# EAGLE board untitled (EAGLE 7.2.0)
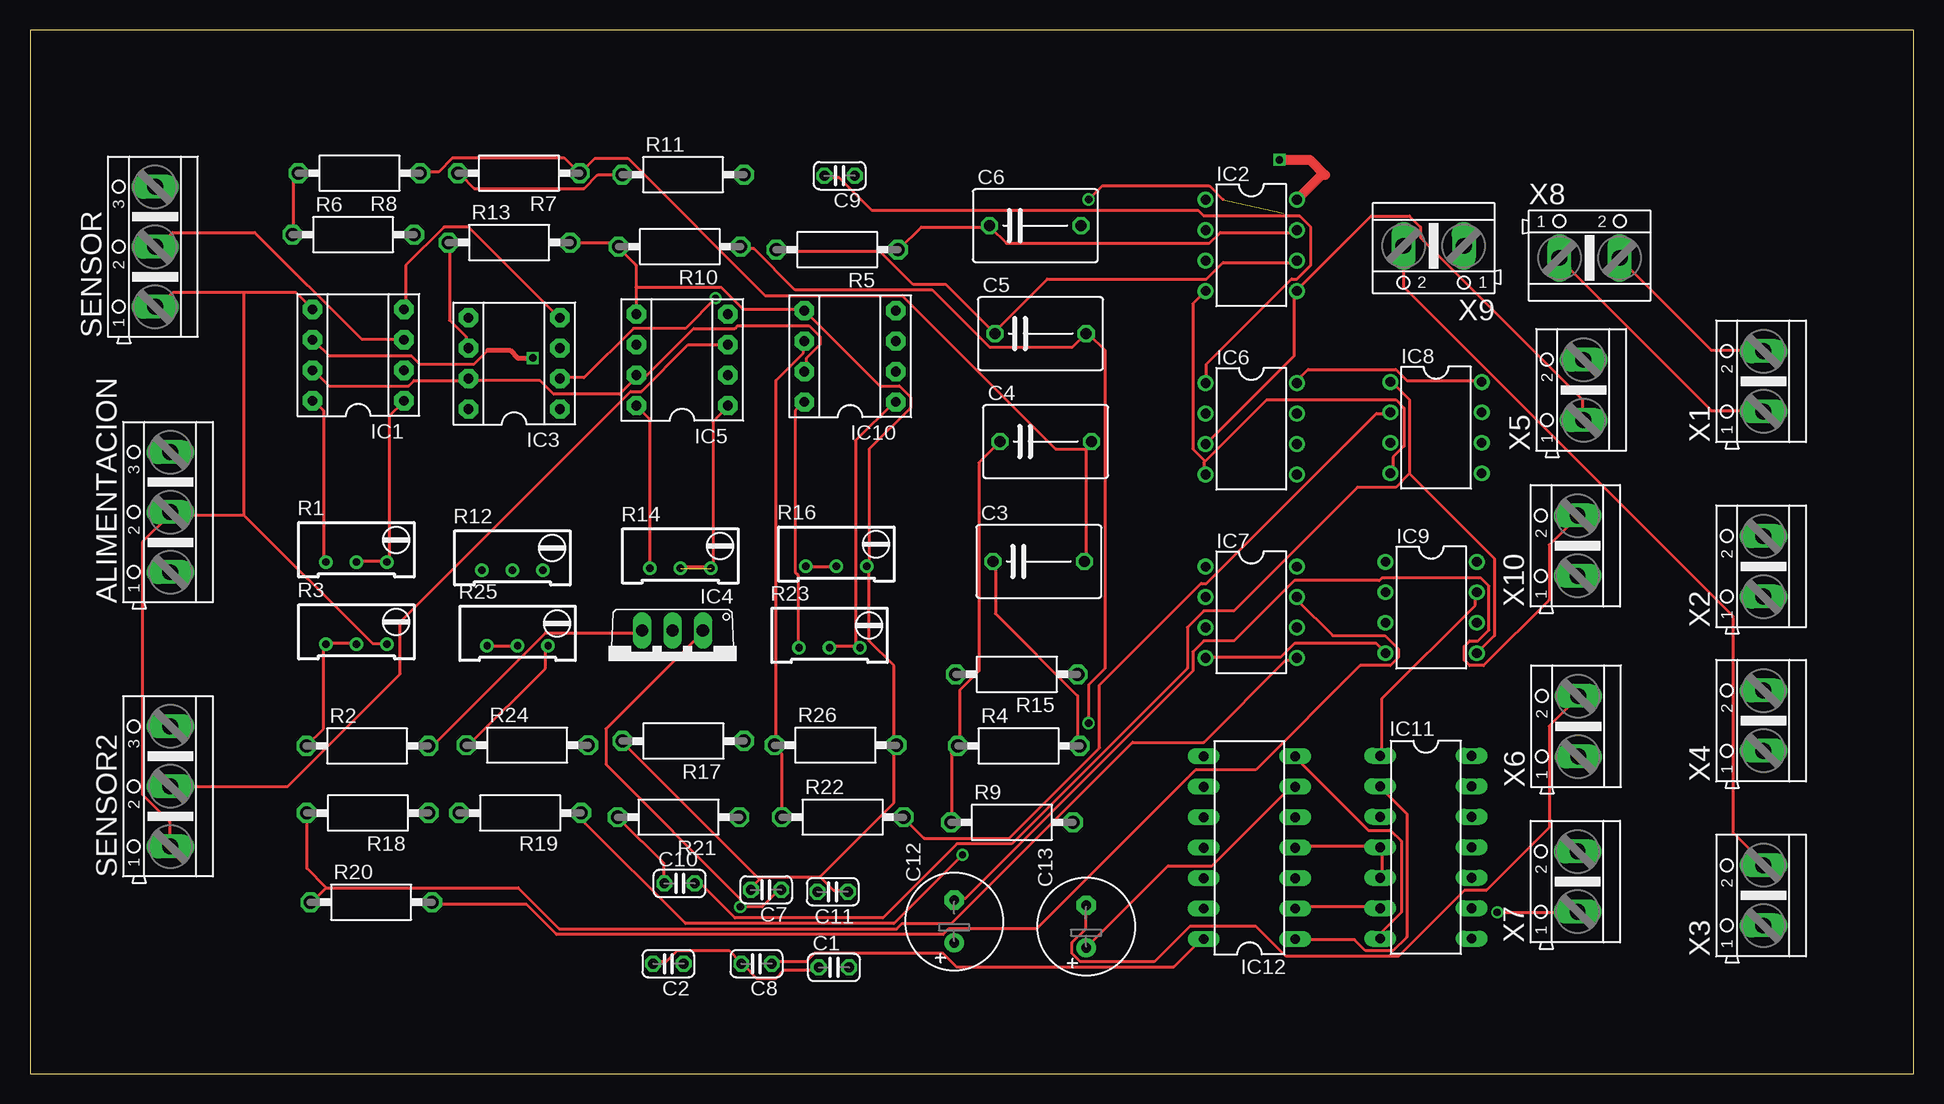
[diagram p0: board, top side]
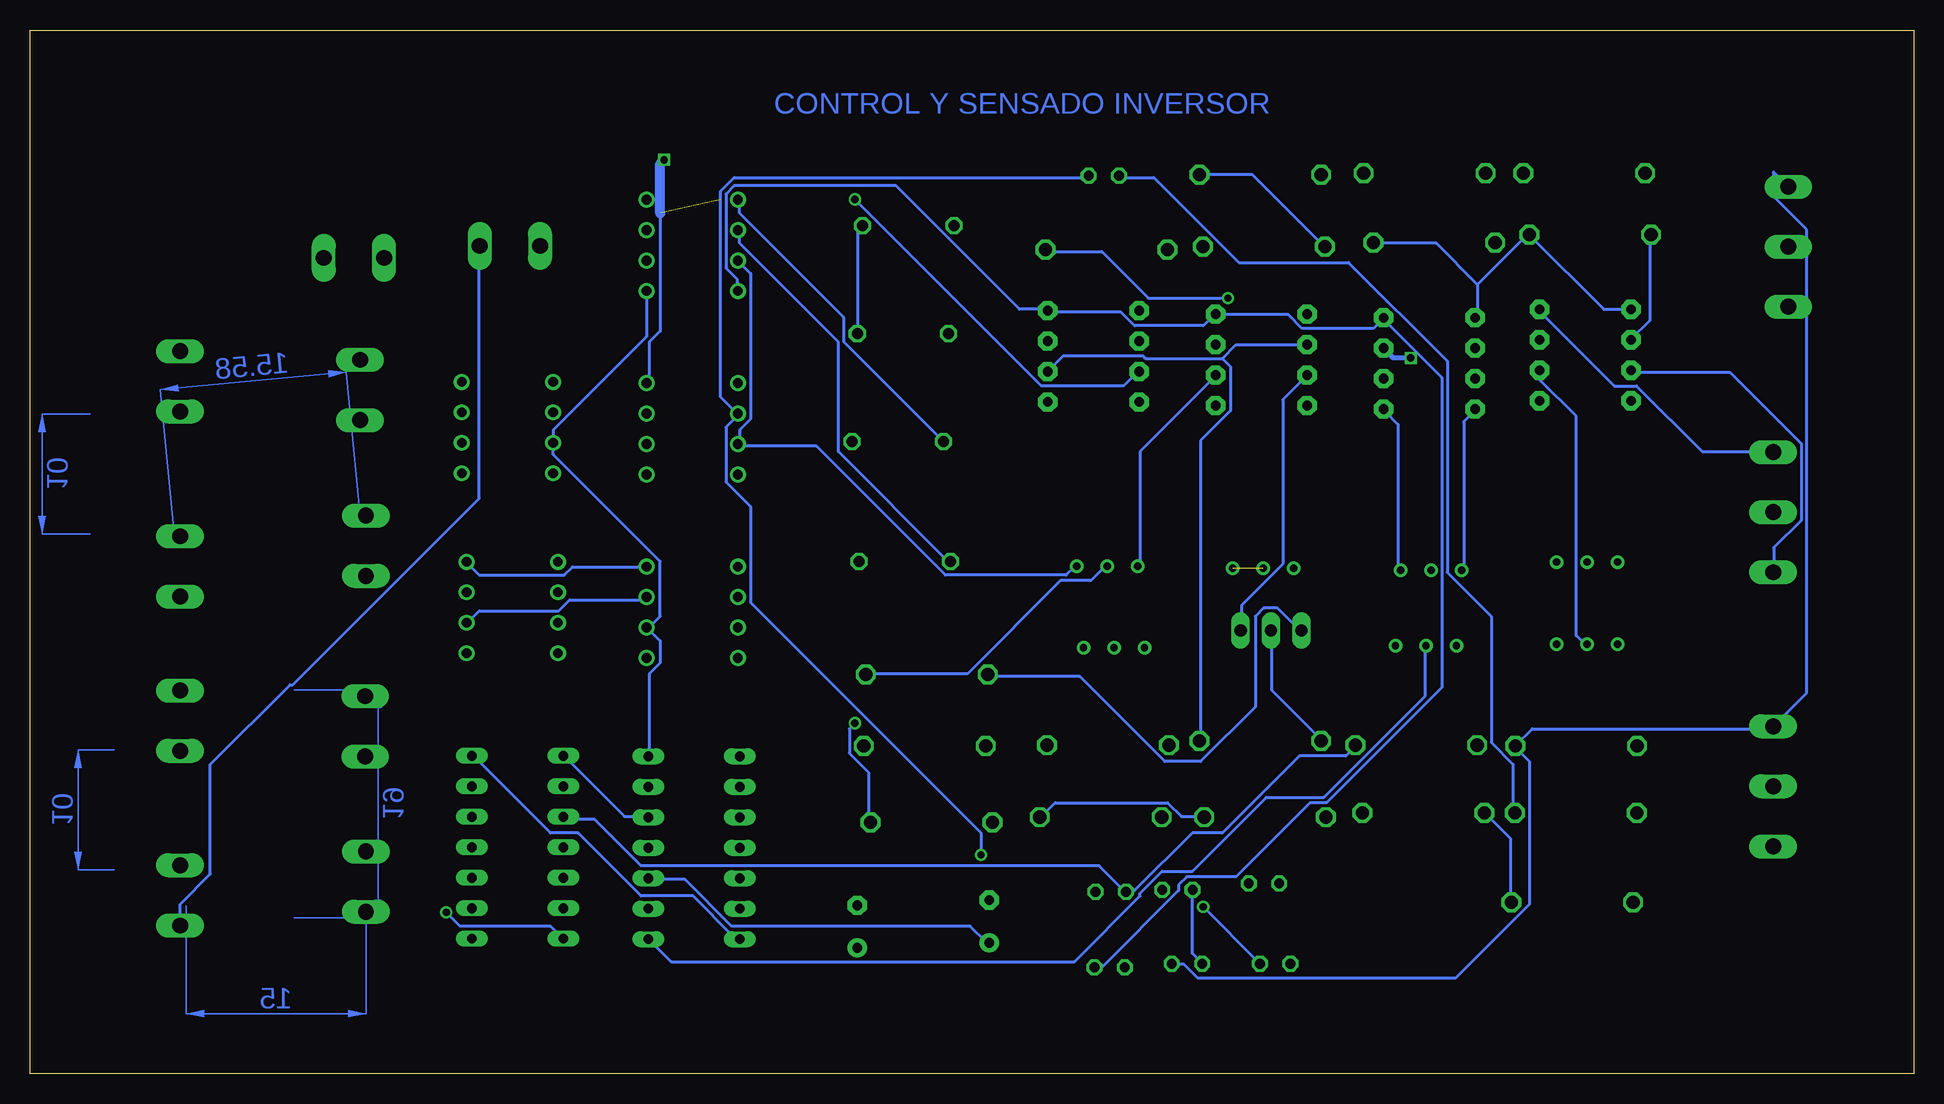
[diagram p1: board, bottom side, seen from below]

Size 157 x 87 mm. Coordinates in mm from the lower left corner, seen from the top.
Outline: 0,0 157,0 157,87 0,87 0,0
Copper layers (1*16): Top 0.035mm / dielectric 1.5mm / Bottom 0.035mm
Design rules "default": minimum track width 10mil, minimum drill 24mil, track to track 8mil, track to pad 8mil, pad to pad 8mil, via to via 8mil, smd to smd 8mil, copper to edge 40mil, drill to drill 8mil, minimum pad ring 10mil, minimum via ring 8mil, stop-mask expansion 4mil, vias tented up to drill 0mil, thermal gap 10mil

## Footprints (pad centres in the part's own frame; a part is rotated, then mirrored left to right if it is on the bottom)
AK500/3 = drill 1.321 long: 1 -5.004,0; 2 0,0; 3 5.004,0
C025-024X044 = drill 0.813 octagon: 1 -1.27,0; 2 1.27,0
C075-063X106 = drill 0.914 octagon: 1 -3.81,0; 2 3.81,0
E3,5-8 = drill 0.813 pad 1.6: + -1.778,0 | drill 0.813 pad 1.6 octagon: - 1.778,0
DIL08 = drill 0.813 pad 1.6 octagon: 1 -3.81,-3.81; 2 -1.27,-3.81; 3 1.27,-3.81; 4 3.81,-3.81; 5 3.81,3.81; 6 1.27,3.81; 7 -1.27,3.81; 8 -3.81,3.81
DIL08' = drill 0.813 pad 1.27: 1 -3.81,-3.81; 2 -1.27,-3.81; 3 1.27,-3.81; 4 3.81,-3.81; 5 3.81,3.81; 6 1.27,3.81; 7 -1.27,3.81; 8 -3.81,3.81
TO220V = drill 1.016 long: 1 -2.54,-2.54; 2 0,-2.54; 3 2.54,-2.54
DIL14 = drill 0.813 long: 1 -7.62,-3.81; 2 -5.08,-3.81; 3 -2.54,-3.81; 4 0,-3.81; 5 2.54,-3.81; 6 5.08,-3.81; 7 7.62,-3.81; 8 7.62,3.81; 9 5.08,3.81; 10 2.54,3.81; 11 0,3.81; 12 -2.54,3.81; 13 -5.08,3.81; 14 -7.62,3.81
RTRIM64W = drill 0.61: 1 1.27,-2.54; 2 1.27,0; 3 1.27,2.54
VMTA55 = drill 1.1 octagon: 1 -5.08,0; 2 5.08,0
AK500/2 = drill 1.321 long: 1 -2.515,0; 2 2.515,0

## Placement (x,y rotation side)
ALIMENTACION  [AK500/3]  11.7,46.8 90 top
C1  0,1uf  [C025-024X044]  67.01,8.85 0 top
C2  0,1uF  [C025-024X044]  53.21,9.15 180 top
C3  1uf  [C075-063X106]  84.09,42.69 0 top
C4  1uf  [C075-063X106]  84.66,52.69 0 top
C5  1uf  [C075-063X106]  84.23,61.69 0 top
C6  1uf  [C075-063X106]  83.8,70.69 0 top
C7  0,33uF  [C025-024X044]  61.36,15.31 180 top
C8  0,1uF  [C025-024X044]  60.56,9.15 180 top
C9  330pF  [C025-024X044]  67.49,74.85 180 top
C10  330pF  [C025-024X044]  54.14,15.85 0 top
C11  10NF  [C025-024X044]  66.91,15.15 180 top
C12  [E3,5-8]  77.04,12.68 90 top
C13  [E3,5-8]  88.04,12.25 90 top
IC1  INA128P  [DIL08]  27.36,59.9 90 top
IC2  LF353N  [DIL08']  101.8,69.05 270 top
IC3  INA128P  [DIL08]  40.36,59.2 90 top
IC4  7805TV  [TO220V]  53.55,34.39 180 top
IC5  INA128P  [DIL08]  54.36,59.5 90 top
IC6  LF353N  [DIL08']  101.8,53.75 270 top
IC7  LF353N  [DIL08']  101.8,38.45 270 top
IC8  LF353N  [DIL08']  117.2,53.85 270 top
IC9  LF353N  [DIL08']  116.8,38.85 270 top
IC10  INA128P  [DIL08]  68.36,59.8 90 top
IC11  74HC04N  [DIL14]  116.35,18.86 270 top
IC12  74HC08N  [DIL14]  101.65,18.82 90 top
R1  20k  [RTRIM64W]  27.21,43.91 270 top
R2  15k  [VMTA55]  28.12,27.31 0 top
R3  5k  [RTRIM64W]  27.21,37.07 270 top
R4  10k  [VMTA55]  82.42,27.31 0 top
R5  3,9k  [VMTA55]  67.28,68.69 180 top
R6  1k  [VMTA55]  26.95,69.93 0 top
R7  2,2k  [VMTA55]  40.75,75.07 180 top
R8  3,3k  [VMTA55]  27.45,75.07 180 top
R9  1,2k  [VMTA55]  81.85,20.93 0 top
R10  1,5k  [VMTA55]  54.15,68.93 180 top
R11  2k  [VMTA55]  54.45,74.93 0 top
R12  20k  [RTRIM64W]  40.21,43.23 270 top
R13  1k  [VMTA55]  39.95,69.28 0 top
R14  20k  [RTRIM64W]  54.21,43.39 270 top
R15  15k  [VMTA55]  82.25,33.28 180 top
R16  5k  [RTRIM64W]  67.21,43.55 270 top
R17  1k  [VMTA55]  54.45,27.72 180 top
R18  27k  [VMTA55]  28.15,21.72 180 top
R19  27k  [VMTA55]  40.85,21.72 180 top
R20  39k  [VMTA55]  28.45,14.28 0 top
R21  1k  [VMTA55]  54.05,21.37 180 top
R22  1k  [VMTA55]  67.75,21.37 0 top
R23  20k  [RTRIM64W]  66.64,36.78 270 top
R24  300  [VMTA55]  41.45,27.37 0 top
R25  10k  [RTRIM64W]  40.64,36.94 270 top
R26  1k  [VMTA55]  67.15,27.37 0 top
SENSOR  [AK500/3]  10.43,68.93 90 top
SENSOR2  [AK500/3]  11.7,23.94 90 top
X1  [AK500/2]  144.49,57.71 90 top
X2  [AK500/2]  144.49,42.28 90 top
X3  [AK500/2]  144.49,14.85 90 top
X4  [AK500/2]  144.49,29.42 90 top
X5  [AK500/2]  129.49,56.99 90 top
X6  [AK500/2]  129.06,28.95 90 top
X7  [AK500/2]  129,16 90 top
X8  [AK500/2]  130,68 0 top
X9  [AK500/2]  117,69 180 top
X10  [AK500/2]  129,44 90 top

## Library data of the parts
ALIMENTACION SENSOR SENSOR2 X1-X10 = con-ptr500; OC_FARNELL: unknown; OC_NEWARK: unknown
C1-C13 R1-R26 = rcl
IC1 IC3 IC5 IC10 = burr-brown; MF: TEXAS INSTRUMENTS; MPN: INA128P; OC_FARNELL: 1212410; OC_NEWARK: 74C9783
IC2 IC4 IC6-IC9 = linear
IC11 IC12 = 74xx-eu

## Nets
-12V: ALIMENTACION.1 C2.1 C7.1 IC1.7 IC2.8 IC3.7 IC4.1 IC5.7 IC6.8 IC8.8 IC10.7
N$1: IC1.1 R1.2 R1.3
N$2: IC1.8 R1.1
N$3: IC11.2 IC12.1 R25.1 R25.2
N$4: IC5.2 R15.1 R16.1 R16.2
N$5: C3.1 IC2.2 R4.2
N$6: IC1.3 SENSOR.2
N$7: C4.1 IC2.1 R4.1 R9.1
N$8: IC1.2 R2.1 R3.1 R3.2
N$9: C5.1 IC2.6 R5.2
N$10: C6.1 IC2.7 IC3.2 R5.1
N$11: C3.2 C4.2 R7.1 R8.1
N$12: C5.2 C6.2 R9.2 R10.1
N$13: IC1.6 IC3.3 R6.1 R8.2
N$14: ALIMENTACION.2 C1.1 C2.2 C7.2 C8.2 C11.1 IC1.5 IC2.3 IC2.5 IC3.5 IC4.2 IC5.5 IC6.3 IC7.6 IC8.3 IC10.5 IC11.7 IC12.7 R3.3 R6.2 R10.2 R11.2 R13.2 R16.3 R17.2 R26.2 SENSOR2.1 SENSOR.1 X5.1 X7.1
N$15: IC3.1 R12.3
N$16: R7.2 R11.1
N$17: IC3.8 R12.1
N$18: IC3.6 R13.1
N$19: IC5.1 R14.2 R14.3
N$20: IC5.8 R14.1
N$21: IC5.3 SENSOR2.2
N$22: C12.+ IC12.3
N$23: IC5.6 IC10.2 R17.1
N$24: C9.1 IC6.2 R19.1
N$25: C9.2 IC6.1 R18.1
N$26: IC7.5 R18.2 R20.1
N$27: IC7.7 IC9.6 R19.2 R20.2
N$28: IC8.2 R21.1 R22.2
N$29: C10.1 R21.2
N$30: C10.2 IC8.1 IC9.5
N$31: R12.2
N$32: C11.2 IC11.3 R24.2
N$33: ALIMENTACION.3 C1.2 IC1.4 IC2.4 IC3.4 IC5.4 IC6.4 IC8.4 IC10.4
N$34: R24.1 R25.3
N$35: IC10.1 R23.2 R23.3
N$36: IC10.8 R23.1
N$37: IC11.4 IC11.5 IC12.4
N$38: IC10.6 R22.1 R26.1
N$39: IC9.7 IC11.1 IC12.5
N$40: C8.1 IC4.3 IC11.14 IC12.14 R2.2 R15.2 SENSOR2.3 SENSOR.3
N$41: IC11.6 IC12.2
N$42: C13.+ IC12.6
N$43: C12.- X10.2
N$44: C13.- X6.2
N$45: X3.2 X9.2
N$46: X3.1 X9.1
N$47: X1.2 X8.2
N$48: X1.1 X8.1
V+: IC7.8 IC9.8
V-: IC7.4 IC9.4

## Tracks (layer width: path | path; a pad name or v marks a point on that pad's centre or on a via)
-12V  (via drill 0.6, 0.61)  (1 unrouted)
  Top 0.254: IC1.7 23.77,58.47 24.92,57.32 31.55,57.32 32,57.78 36.35,57.78 IC3.7 36.58,57.78 42.52,57.78 43.66,56.64 49.15,56.64 50.52,58.01 IC5.7 50.75,58.24 51.44,58.24 55.32,62.12 58.75,62.12 58.98,62.35 64.92,62.35 65.84,61.44 65.84,60.75 64.69,59.61 64.69,58.7 IC10.7 | IC8.8 120.93,57.78 114.76,57.78 113.84,58.7 106.53,58.7 105.61,57.78 IC6.8 | C7.1 62.41,15.26 61.04,13.89 v59.21,13.89 59.21,14.58 48.01,25.78 48.01,28.75 56.01,36.75 IC4.1 | 99.44,72.87 98.3,74.01 89.38,74.01 v88.24,72.87
  Top 0.813: v104.14,76.17 106.68,76.17 107.95,74.9 107.65,74.9 IC2.8
  Bottom 0.254: ALIMENTACION.1 11.66,42.01 11.66,43.84 9.37,46.12 9.37,52.52 15.32,58.47 23.55,58.47 IC1.7 | 104.47,71.72 104.47,61.89 105.39,60.98 105.39,57.78 IC6.8 | v59.21,13.89 54.63,9.32 C2.1 | IC4.1 56.01,36.98 56.01,39.03 52.58,42.46 52.58,56.18 50.75,58.01 IC5.7 | v88.24,72.87 72.69,57.32 65.84,57.32 64.69,58.47 IC10.7
  Bottom 0.813: 104.47,71.72 104.47,75.84 v104.14,76.17
N$1
  Top 0.254: R1.2 27.43,42.69 29.72,42.69 R1.3 29.95,42.69 29.95,54.81 31.09,55.95 IC1.1
N$2
  Top 0.254: R1.1 24.46,42.69 24.46,55.27 23.77,55.95 IC1.8
N$3
  Top 0.254: R25.1 38.18,35.61 40.46,35.61 R25.2 | IC12.1 105.61,11.15 110.41,11.15 111.33,10.23 113.61,10.23 114.76,11.38 114.76,21.66 112.7,23.72 IC11.2
  Bottom 0.254: R25.2 40.69,35.61 40.69,31.49 49.15,23.03 53.95,23.03 60.12,16.86 62.64,16.86 64.47,15.03 64.47,14.8 69.95,9.32 103.56,9.32 105.39,11.15 IC12.1
N$4
  Top 0.254: R16.1 64.69,42.24 67.21,42.24 R16.2
  Bottom 0.254: R16.1 64.47,42.46 64.47,51.84 58.29,58.01 IC5.2 | R15.1 87.33,33.32 78.87,33.32 71.09,41.09 68.58,41.09 67.44,42.24 R16.2
N$5
  Top 0.254: R4.2 87.33,27.38 87.33,31.49 80.47,38.35 80.47,42.46 C3.1
  Bottom 0.254: IC2.2 97.84,70.12 97.84,69.21 89.61,60.98 89.61,51.84 80.47,42.69 C3.1
N$6
  Top 0.254: IC1.3 31.09,61.21 27.66,61.21 18.75,70.12 11.89,70.12 SENSOR.2
N$7
  Top 0.254: R9.1 76.81,20.98 76.81,26.69 77.27,27.15 R4.1 77.5,27.38 77.5,31.95 79.1,33.55 79.1,50.92 80.7,52.52 C4.1
  Bottom 0.254: IC2.1 97.84,72.64 97.84,71.72 89.15,63.04 89.15,60.98 80.92,52.75 C4.1
N$8
  Top 0.254: R3.2 27.2,35.84 24.69,35.84 R3.1 24.46,35.61 24.46,28.75 23.09,27.38 R2.1
  Bottom 0.254: IC1.2 31.09,58.47 31.09,57.78 28.12,54.81 28.12,36.52 27.43,35.84 R3.2
N$9
  Top 0.254: IC2.6 105.39,67.61 99.44,67.61 98.07,66.24 84.81,66.24 80.47,61.89 C5.1 80.24,61.89 76.35,65.78 73.61,65.78 70.87,68.53 62.41,68.53 R5.2
N$10  (via drill 0.61)
  Top 0.254: IC2.7 105.39,70.12 99.21,70.12 98.3,69.21 81.38,69.21 80.01,70.58 C6.1 79.78,70.58 74.3,70.58 72.47,68.75 R5.1 | v57.15,64.64 54.63,62.12 50.29,62.12 46.18,58.01 44.35,58.01 IC3.2
  Bottom 0.254: v57.15,64.64 63.78,64.64 67.67,68.53 72.24,68.53 R5.1
N$11
  Top 0.254: 88.01,52.06 88.01,42.69 C3.2 | 88.01,52.06 88.47,52.52 C4.2 | R8.1 32.69,75.15 34.06,75.15 35.2,76.3 44.58,76.3 45.72,75.15 R7.1 45.95,75.15 47.09,76.3 49.84,76.3 61.27,64.87 72.69,64.87 85.5,52.06 88.01,52.06
N$12  (via drill 0.61)
  Top 0.254: v88.24,29.2 88.24,32.41 89.61,33.78 89.61,60.3 88.24,61.67 C5.2 88.01,61.67 86.87,60.52 80.01,60.52 75.21,65.32 63.78,65.32 60.35,68.75 59.44,68.75 R10.1
  Bottom 0.254: C5.2 88.01,61.89 88.01,70.35 87.78,70.58 C6.2 | v88.24,29.2 88.7,28.75 88.7,26.69 87.1,25.09 87.1,20.98 R9.2
N$13  (via drill 0.6)
  Top 0.254: R6.1 21.95,70.12 21.95,74.7 22.17,74.92 R8.2 | 38.18,60.3 37.03,59.15 32.46,59.15 31.77,59.84 24.92,59.84 23.77,60.98 IC1.6
  Top 0.406: 38.18,60.3 40.01,60.3 40.64,59.66 v41.91,59.66
  Bottom 0.254: R6.1 21.95,69.9 21.95,62.81 23.55,61.21 IC1.6
  Bottom 0.406: v41.91,59.66 43.36,59.66 IC3.3
N$14  (via drill 0.61)
  Top 0.254: IC6.3 98.07,52.52 105.39,59.84 105.39,65.1 IC2.5 105.61,65.32 111.78,71.5 114.99,71.5 115.9,70.58 115.9,69.67 129.39,56.18 129.39,54.58 X5.1 | IC11.7 112.7,11.38 112.7,11.83 114.3,13.43 114.3,19.38 113.39,20.29 111.56,20.29 105.61,26.23 IC12.7 | v122.3,13.43 128.93,13.43 X7.1 | C2.2 52.12,9.32 53.03,9.32 53.95,10.23 58.29,10.23 59.21,9.32 C8.2 59.44,9.09 60.58,7.95 62.18,7.95 62.87,8.63 65.61,8.63 C1.1 | 65.84,16.4 66.98,15.26 68.12,15.26 C11.1 | 65.84,16.4 61.04,16.4 60.81,16.17 | 60.81,16.17 60.12,15.49 C7.2 | 60.81,16.17 49.38,27.61 R17.2 | 65.84,16.4 72.01,22.58 72.01,27.15 R26.2 72.01,27.38 72.01,34.01 69.95,36.06 69.95,42.24 R16.3 69.95,42.46 69.95,52.06 73.38,55.49 73.38,56.41 72.47,57.32 70.87,57.32 64.69,63.49 IC10.5 64.47,63.72 59.44,63.72 57.61,65.55 50.52,65.55 | 17.83,46.58 28.57,35.84 29.72,35.84 R3.3 | 17.83,46.58 11.89,46.58 ALIMENTACION.2 11.66,46.58 9.37,44.29 9.37,23.26 11.66,20.98 11.66,19.15 SENSOR2.1 | 50.52,65.55 50.52,67.38 49.15,68.75 R10.2 48.92,68.98 48.69,69.21 45.03,69.21 R13.2 | 50.52,65.55 50.52,63.49 IC5.5 | 17.83,65.1 22.17,65.1 23.55,63.72 IC1.5 | 17.83,65.1 11.89,65.1 SENSOR.1 | 17.83,65.1 17.83,46.58
  Bottom 0.254: IC2.3 97.84,67.61 96.93,66.7 96.93,54.58 97.84,53.67 97.84,52.52 IC6.3 97.84,52.29 91.44,52.29 80.7,41.55 70.64,41.55 69.95,42.24 R16.3 | IC2.5 105.61,65.1 105.61,61.44 113.39,53.67 113.39,52.75 IC8.3 113.39,52.52 113.39,51.61 104.47,42.69 104.47,38.12 105.39,37.21 IC7.6 105.39,36.98 104.47,36.06 104.47,34.23 105.39,33.32 105.39,26.46 IC12.7 | v122.3,13.43 121.16,12.29 113.61,12.29 112.7,11.38 IC11.7 | IC4.2 53.49,36.75 53.49,31.95 49.38,27.83 R17.2 | C7.2 60.12,15.26 60.12,10 59.44,9.32 C8.2 | R11.2 59.44,74.92 55.09,74.92 49.15,68.98 R10.2 | 36.35,65.78 36.35,63.04 IC3.5 | 36.35,65.78 32.23,69.9 R6.2 32,69.9 25.83,63.72 23.77,63.72 IC1.5 | 36.35,65.78 39.78,69.21 44.81,69.21 R13.2
N$15
  Bottom 0.254: R12.3 42.98,42.01 42.98,54.12 44.12,55.27 IC3.1
N$16
  Top 0.254: R11.1 49.15,74.92 47.32,74.92 46.18,73.78 37.03,73.78 35.89,74.92 R7.2
N$17
  Bottom 0.254: R12.1 37.49,42.01 37.49,54.35 36.58,55.27 IC3.8
N$18
  Top 0.254: IC3.6 36.35,60.52 36.35,61.44 34.98,62.81 34.98,69.21 R13.1
N$19  (1 unrouted)
  Top 0.254: R14.2 54.41,42.24 56.69,42.24 R14.3 56.92,42.24 56.92,54.35 58.06,55.49 IC5.1
N$20
  Top 0.254: R14.1 51.66,42.24 51.66,54.58 50.75,55.49 IC5.8
N$21
  Top 0.254: IC5.3 58.06,60.75 54.86,60.75 50.98,56.87 50.06,56.87 30.86,37.66 30.86,33.32 21.49,23.95 11.89,23.95 SENSOR2.2
N$22
  Bottom 0.254: IC12.3 105.39,16.17 102.41,16.17 98.53,12.29 78.64,12.29 77.27,10.92 C12.+
N$23
  Bottom 0.254: 57.61,59.61 56.46,60.75 50.75,60.75 IC5.6 | 57.61,59.61 64.01,59.61 64.24,59.84 70.87,59.84 72.01,58.7 IC10.2 | 57.61,59.61 56.92,58.92 56.92,55.27 59.44,52.75 59.44,27.83 R17.1
N$24  (via drill 0.61)
  Top 0.254: v77.72,18.23 72.01,12.52 54.63,12.52 45.95,21.2 45.95,21.66 R19.1
  Bottom 0.254: C9.1 68.81,74.7 98.3,74.7 99.44,73.55 99.44,56.41 98.07,55.04 IC6.2 98.07,54.81 98.98,53.89 98.98,49.32 96.93,47.27 96.93,39.26 77.72,20.06 v77.72,18.23
N$25
  Top 0.254: C9.2 66.29,74.7 67.44,74.7 70.18,71.95 97.38,71.95 97.84,71.5 105.84,71.5 106.76,70.58 106.76,67.38 105.61,66.24 105.16,66.24 98.07,59.15 98.07,57.78 IC6.1
  Bottom 0.254: R18.1 33.38,21.89 33.38,25.78 35.2,27.61 35.2,38.12 38.86,41.78 38.86,59.38 47.09,67.61 56.24,67.61 63.32,74.7 66.06,74.7 C9.2
N$26
  Top 0.254: 24.69,15.49 40.69,15.49 44.12,12.06 72.24,12.06 72.69,12.52 76.81,12.52 91.9,27.61 97.84,27.61 104.7,34.46 105.39,34.46 IC7.5 | 24.69,15.49 23.55,14.35 R20.1 | 24.69,15.49 23.09,17.09 23.09,21.66 R18.2
N$27
  Top 0.254: R20.2 33.6,14.12 41.38,14.12 43.89,11.6 76.12,11.6 76.58,12.06 83.9,12.06 97.16,25.32 102.18,25.32 110.87,34.01 113.39,34.01 114.07,34.69 114.07,35.38 112.93,36.52 108.58,36.52 105.61,39.49 IC7.7
  Bottom 0.254: R20.2 33.6,14.35 33.6,19.6 35.66,21.66 R19.2 | IC7.7 105.61,39.49 112.01,39.49 112.93,38.58 119.56,38.58 120.47,37.66 IC9.6
N$28
  Top 0.254: IC8.2 113.39,55.04 112.24,55.04 98.07,40.86 97.61,40.86 89.15,32.41 89.15,27.15 81.61,19.6 74.52,19.6 72.92,21.2 R22.2
  Bottom 0.254: R21.1 59.21,21.43 61.04,21.43 62.18,22.58 71.55,22.58 72.69,21.43 R22.2
N$29
  Top 0.254: C10.1 52.81,15.95 52.81,17.55 49.15,21.2 R21.2
N$30
  Top 0.254: 114.99,50.01 113.84,48.87 110.64,48.87 100.36,38.58 97.84,38.58 96.47,37.21 96.47,33.78 81.84,19.15 77.27,19.15 71.09,12.98 58.75,12.98 56.01,15.72 55.55,15.72 C10.2 | 114.99,50.01 114.99,56.18 113.61,57.55 IC8.1 | 114.99,50.01 122.07,42.92 122.07,36.52 120.7,35.15 IC9.5
N$32
  Bottom 0.254: R24.2 46.63,27.15 47.32,26.46 51.21,26.46 57.61,20.06 60.12,20.06 64.92,15.26 65.61,15.26 C11.2 65.84,15.26 67.89,17.32 106.07,17.32 109.96,21.2 112.47,21.2 IC11.3
N$33
  Top 0.254: 97.84,50.92 97.84,51.15 96.93,52.06 96.93,64.18 97.84,65.1 IC2.4 | 97.84,50.92 97.84,50.01 IC6.4 | 97.84,50.92 103.1,56.18 113.84,56.18 114.53,55.49 114.53,52.29 113.61,51.38 113.61,50.24 IC8.4 | IC1.4 31.32,63.72 31.32,67.38 34.52,70.58 36.58,70.58 44.12,63.04 IC3.4
  Bottom 0.254: C1.2 68.12,8.86 67.67,8.86 61.27,15.26 61.27,15.72 60.58,16.4 56.46,16.4 50.29,22.58 48.92,22.58 39.32,32.18 39.32,58.01 44.12,62.81 IC3.4 44.35,62.81 45.03,62.12 50.98,62.12 52.12,63.27 58.06,63.27 IC5.4 58.29,63.27 59.21,62.35 64.92,62.35 66.06,63.49 72.01,63.49 IC10.4 72.24,63.72 74.52,63.72 84.81,74.01 98.3,74.01 98.98,73.33 98.98,67.15 98.07,66.24 98.07,65.32 IC2.4 | ALIMENTACION.3 11.89,51.84 17.6,51.84 23.09,57.32 24.92,57.32 31.09,63.49 IC1.4
N$34
  Top 0.254: R25.3 42.98,35.61 42.98,33.78 36.58,27.38 R24.1
N$35
  Top 0.254: 68.81,35.61 69.04,35.61 R23.3 68.81,35.61 | 68.81,35.61 66.75,35.61 R23.2 | 68.81,35.61 68.81,52.75 72.01,55.95 IC10.1
N$36
  Top 0.254: R23.1 64.01,35.61 64.01,41.55 63.78,41.78 63.78,55.27 64.47,55.95 IC10.8
N$37
  Top 0.254: IC11.5 112.7,16.4 112.7,18.69 IC11.4 112.47,18.92 105.61,18.92 IC12.4
N$38
  Top 0.254: IC10.6 64.47,60.98 64.47,60.07 62.18,57.78 62.18,27.38 R26.1 62.18,27.15 62.64,26.69 62.64,21.43 R22.1
N$39
  Top 0.254: IC9.7 120.47,39.95 120.47,39.03 112.7,31.26 112.7,26.69 IC11.1
  Bottom 0.254: IC12.5 105.61,21.43 107.44,21.43 112.47,26.46 IC11.1
N$40
  Top 0.254: C8.1 61.95,9.32 64.69,9.32 65.38,10 76.12,10 77.27,8.86 95.33,8.86 97.61,11.15 IC12.14 | IC4.3 50.98,36.75 42.98,36.75 33.38,27.15 R2.2
  Bottom 0.254: IC11.14 120.02,26.46 113.61,20.06 111.33,20.06 106.07,14.8 101.73,14.8 98.3,11.38 97.84,11.38 IC12.14 | R15.2 77.04,33.09 69.49,33.09 62.41,26 59.44,26 54.86,30.58 54.86,38.12 54.18,38.81 53.03,38.81 51.21,36.98 IC4.3 | SENSOR.3 11.66,75.15 11.66,73.1 8.91,70.35 8.91,31.72 11.66,28.98 SENSOR2.3 11.89,28.75 31.77,28.75 33.15,27.38 R2.2 33.15,27.15 32,26 32,14.12 38.18,7.95 59.66,7.95 60.81,9.09 61.72,9.09 C8.1
N$41
  Top 0.254: IC12.2 105.61,13.89 112.47,13.89 IC11.6
N$42
  Top 0.254: IC12.6 105.39,23.72 104.93,23.72 98.53,17.32 94.87,17.32 88.24,10.69 C13.+
N$43
  Top 0.254: C12.- 77.27,14.58 77.95,14.58 96.93,33.55 96.93,35.15 97.84,36.06 100.36,36.06 105.39,41.09 112.47,41.09 112.7,41.32 120.93,41.32 121.61,40.63 121.61,36.98 120.7,36.06 120.02,36.06 119.56,35.61 119.56,34.46 120.02,34.01 121.16,34.01 126.64,39.49 126.64,44.06 128.93,46.35 X10.2
N$44
  Top 0.254: C13.- 88.01,13.89 88.01,12.06 86.87,10.92 86.87,10 87.55,9.32 93.73,9.32 96.7,12.29 102.18,12.29 104.7,9.77 114.07,9.77 119.56,15.26 121.39,15.26 126.64,20.52 126.64,28.98 128.93,31.26 X6.2
N$45
  Top 0.254: X9.2 114.53,68.98 114.53,65.55 141.96,38.12 141.96,20.06 144.47,17.55 X3.2
N$46
  Bottom 0.254: X9.1 119.56,68.98 119.56,47.95 135.1,32.41 135.33,32.41 141.96,25.78 141.96,16.63 144.47,14.12 144.47,12.52 X3.1
N$47
  Top 0.254: X1.2 144.47,60.3 140.13,60.3 132.59,67.84 X8.2
N$48
  Top 0.254: X1.1 144.47,55.27 140.13,55.27 127.56,67.84 X8.1
V+
  Bottom 0.254: IC7.8 105.61,42.24 111.78,42.24 112.47,41.55 119.56,41.55 120.47,42.46 IC9.8
V-
  Top 0.254: IC7.4 98.07,34.69 104.24,34.69 105.39,35.84 112.24,35.84 112.93,35.15 IC9.4
(copper drawn outside any net)
  shapes: Bottom area x5

## Text on the board
Bottom: CONTROL Y SENSADO INVERSOR